# EAGLE board Bleasy-Pan (EAGLE 7.0.0)
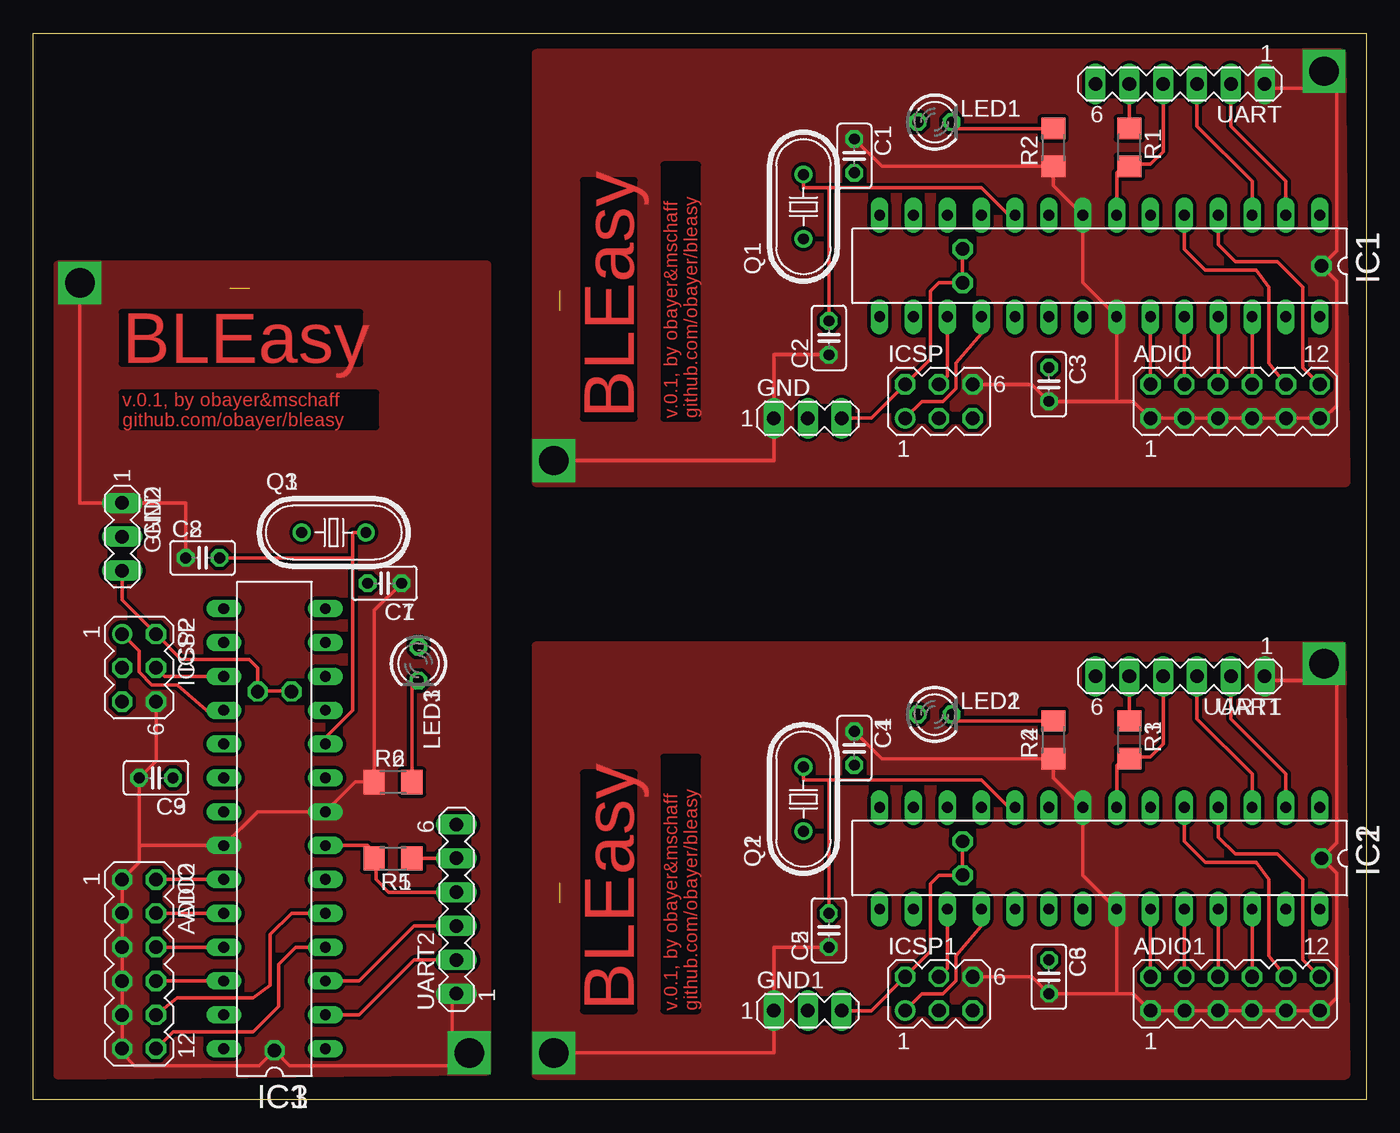
[diagram p0: board, top side]
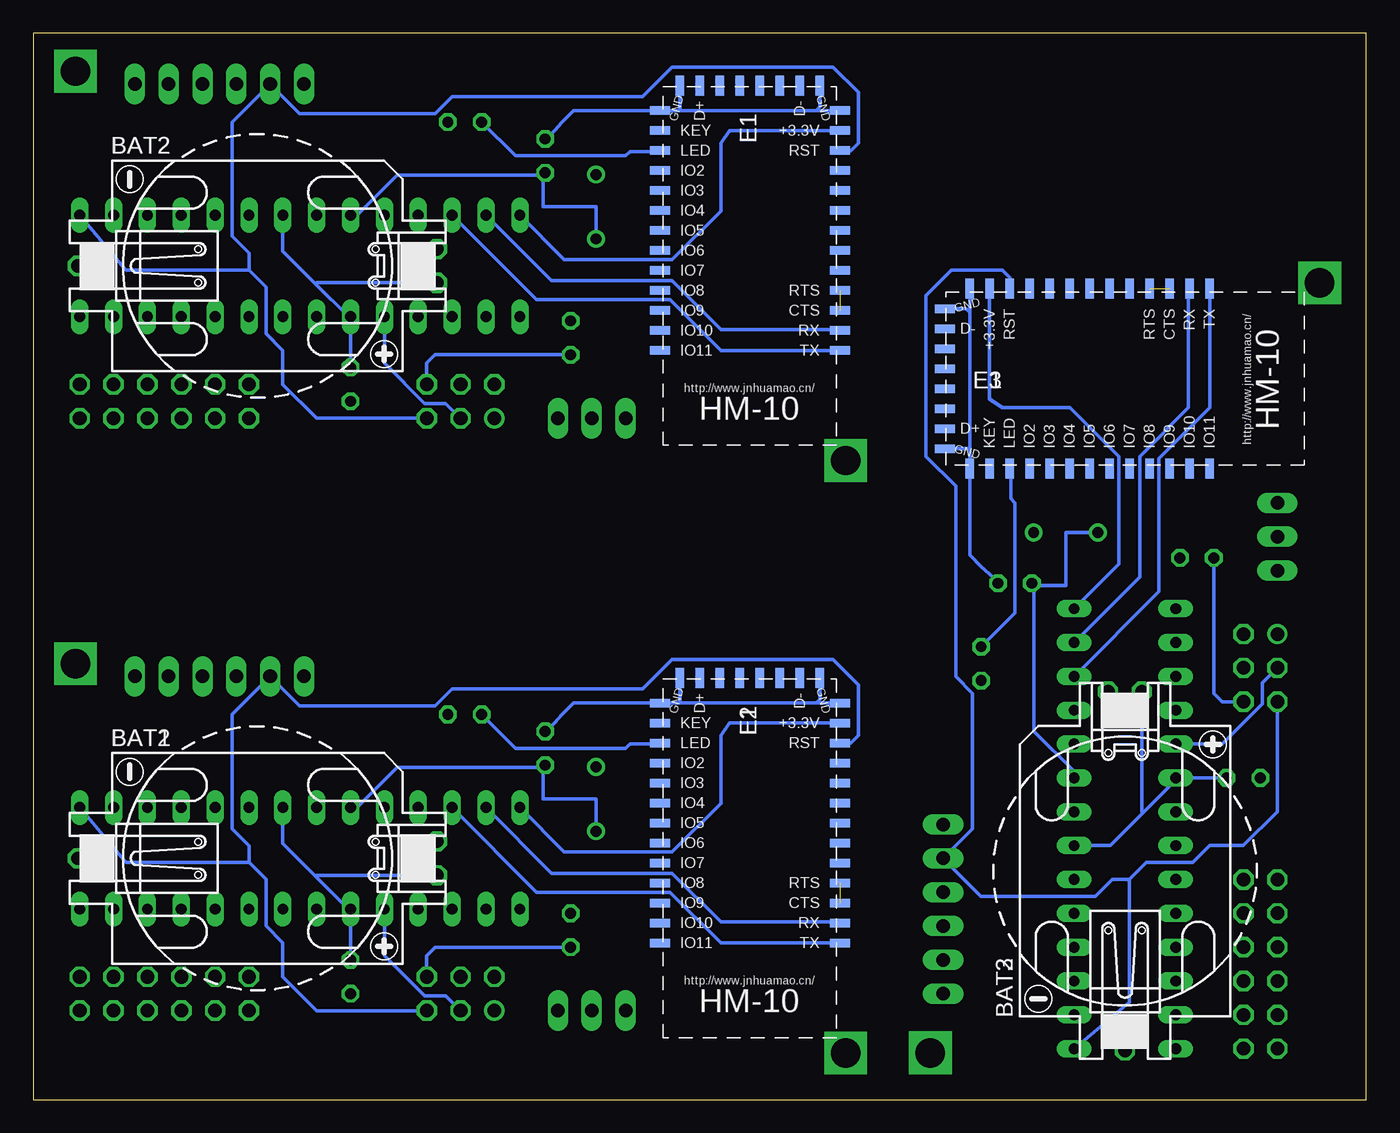
[diagram p1: board, bottom side, seen from below]

Size 100 x 80 mm. Coordinates in mm from the lower left corner, seen from the top.
Outline: 100,0 0,0 0,80 100,80 100,0
Copper layers (1*16): Top 0.035mm / dielectric 1.5mm / Bottom 0.035mm
Design rules "default": minimum track width 10mil, minimum drill 24mil, track to track 8mil, track to pad 8mil, pad to pad 8mil, via to via 8mil, smd to smd 8mil, copper to edge 40mil, drill to drill 8mil, minimum pad ring 10mil, minimum via ring 8mil, stop-mask expansion 4mil, vias tented up to drill 0mil, thermal gap 10mil

## Footprints (pad centres in the part's own frame; a part is rotated, then mirrored left to right if it is on the bottom)
MA06-2 = drill 1.016 octagon: 1 -6.35,-1.27; 2 -6.35,1.27; 3 -3.81,-1.27; 4 -3.81,1.27; 5 -1.27,-1.27; 6 -1.27,1.27; 7 1.27,-1.27; 8 1.27,1.27; 9 3.81,-1.27; 10 3.81,1.27; 11 6.35,-1.27; 12 6.35,1.27
CR2032-SOCKET-THT = drill 1 octagon: 1 -13.462,0; 2 13.462,-1.27; 3 13.462,1.27
C025-025X050 = drill 0.813 octagon: 1 -1.27,0; 2 1.27,0
26.9X13X2.2_BOARD = smd 1.5 x 0.635: 1 -7.5,0; 2 -7.5,-1.5; 3 -7.5,-3; 4 -7.5,-4.5; 5 -7.5,-6; 6 -7.5,-7.5; 8 -7.5,-10.5; 9 -7.5,-12; 10 -7.5,-13.5; 11 -7.5,-15; 12 -7.5,-16.5; 13 -7.5,-18; 22 6,-18; 23 6,-16.5; 24 6,-15; 25 6,-13.5; 26 6,-12; 27 6,-10.5; 28 6,-9; 29 6,-7.5; 30 6,-6; 31 6,-4.5; 32 6,-3; 33 6,-1.5; 34 6,0; $7 -7.5,-9 | smd 0.635 x 1.5: 14 -6,-19.875; 15 -4.5,-19.875; 16 -3,-19.875; 17 -1.5,-19.875; 18 0,-19.875; 19 1.5,-19.875; 20 3,-19.875; 21 4.5,-19.875
MA03-1 = drill 1.016 long: 1 -2.54,0; 2 0,0; 3 2.54,0
DIL28-3 = drill 0.813 long: 1 -16.51,-3.81; 2 -13.97,-3.81; 3 -11.43,-3.81; 4 -8.89,-3.81; 5 -6.35,-3.81; 6 -3.81,-3.81; 7 -1.27,-3.81; 8 1.27,-3.81; 9 3.81,-3.81; 10 6.35,-3.81; 11 8.89,-3.81; 12 11.43,-3.81; 13 13.97,-3.81; 14 16.51,-3.81; 15 16.51,3.81; 16 13.97,3.81; 17 11.43,3.81; 18 8.89,3.81; 19 6.35,3.81; 20 3.81,3.81; 21 1.27,3.81; 22 -1.27,3.81; 23 -3.81,3.81; 24 -6.35,3.81; 25 -8.89,3.81; 26 -11.43,3.81; 27 -13.97,3.81; 28 -16.51,3.81
MA03-2 = drill 1.016: 1 -2.54,-1.27 | drill 1.016 octagon: 2 -2.54,1.27; 3 0,-1.27; 4 0,1.27; 5 2.54,-1.27; 6 2.54,1.27
LED3MM = drill 0.813 octagon: A -1.27,0; K 1.27,0
HC49U70 = drill 0.813: 1 -2.413,0; 2 2.413,0
R1206 = smd 1.6 x 1.803: 1 -1.422,0; 2 1.422,0
MA06-1 = drill 1.016 long: 1 -6.35,0; 2 -3.81,0; 3 -1.27,0; 4 1.27,0; 5 3.81,0; 6 6.35,0

## Placement (x,y rotation side)
ADIO  [MA06-2]  90.17,52.39 0 top
ADIO1  [MA06-2]  90.17,7.94 0 top
ADIO2  [MA06-2]  7.94,10.16 270 top
BAT1  CR2032_2+_1-SKT  [CR2032-SOCKET-THT]  83.18,18.1 0 bottom
BAT2  CR2032_2+_1-SKT  [CR2032-SOCKET-THT]  83.18,62.55 0 bottom
BAT3  CR2032_2+_1-SKT  [CR2032-SOCKET-THT]  18.1,17.15 90 bottom
C1  22p  [C025-025X050]  61.59,70.8 270 top
C2  22p  [C025-025X050]  59.69,57.15 90 top
C3  100n  [C025-025X050]  76.2,53.66 270 top
C4  22p  [C025-025X050]  61.59,26.35 270 top
C5  22p  [C025-025X050]  59.69,12.7 90 top
C6  100n  [C025-025X050]  76.2,9.21 270 top
C7  22p  [C025-025X050]  26.35,38.74 180 top
C8  22p  [C025-025X050]  12.7,40.64 0 top
C9  100n  [C025-025X050]  9.21,24.13 180 top
E1  HM-10-BOARD  [26.9X13X2.2_BOARD]  46.99,56.2 180 bottom
E2  HM-10-BOARD  [26.9X13X2.2_BOARD]  46.99,11.75 180 bottom
E3  HM-10-BOARD  [26.9X13X2.2_BOARD]  11.75,53.34 270 bottom
GND  [MA03-1]  58.1,51.12 0 top
GND1  [MA03-1]  58.1,6.67 0 top
GND2  [MA03-1]  6.67,42.23 270 top
IC1  ATMEGA328-PU  [DIL28-3]  80.01,62.55 180 top
IC2  ATMEGA328-PU  [DIL28-3]  80.01,18.1 180 top
IC3  ATMEGA328-PU  [DIL28-3]  18.1,20.32 90 top
ICSP  [MA03-2]  67.94,52.39 0 top
ICSP1  [MA03-2]  67.94,7.94 0 top
ICSP2  [MA03-2]  7.94,32.39 270 top
LED1  [LED3MM]  67.63,73.34 0 top
LED2  [LED3MM]  67.63,28.89 0 top
LED3  [LED3MM]  28.89,32.7 270 top
Q1  8 MHz  [HC49U70]  57.78,66.99 90 top
Q2  8 MHz  [HC49U70]  57.78,22.54 90 top
Q3  8 MHz  [HC49U70]  22.54,42.55 0 top
R1  100k  [R1206]  82.23,71.44 270 top
R2  270  [R1206]  76.52,71.44 90 top
R3  100k  [R1206]  82.23,26.99 270 top
R4  270  [R1206]  76.52,26.99 90 top
R5  100k  [R1206]  26.99,18.1 180 top
R6  270  [R1206]  26.99,23.81 0 top
UART  \  [MA06-1]  86.04,76.2 180 top
UART1  \  [MA06-1]  86.04,31.75 180 top
UART2  \  [MA06-1]  31.75,14.29 90 top

## Library data of the parts
ADIO ADIO1 ADIO2 GND GND1 GND2 ICSP ICSP1 ICSP2 UART UART1 UART2 = con-lstb; OC_FARNELL: unknown; OC_NEWARK: unknown
BAT1-BAT3 = con_bat_2032__s_
C1-C9 = rcl
E1-E3 = JNHuaMao
IC1-IC3 = ATMEGA328P
LED1-LED3 = led
Q1-Q3 = crystal; OC_FARNELL: unknown; OC_NEWARK: unknown
R1-R6 = resistor

## Nets
+3V1: BAT1.2 BAT1.3 C6.1 GND1.3 IC2.7 IC2.20 ICSP1.2 R3.2 UART1.4
+3V2: BAT3.2 BAT3.3 C9.1 GND2.3 IC3.7 IC3.20 ICSP2.2 R5.2 UART2.4
+3V3: BAT2.2 BAT2.3 C3.1 GND.3 IC1.7 IC1.20 ICSP.2 R1.2 UART.4
GND: ADIO.1 ADIO.3 ADIO.5 ADIO.7 ADIO.9 ADIO.11 BAT2.1 C1.1 C2.1 C3.2 E1.13 E1.14 E1.21 E1.22 GND.1 IC1.8 IC1.22 ICSP.6 R2.1 UART.1
GND1: ADIO1.1 ADIO1.3 ADIO1.5 ADIO1.7 ADIO1.9 ADIO1.11 BAT1.1 C4.1 C5.1 C6.2 E2.13 E2.14 E2.21 E2.22 GND1.1 IC2.8 IC2.22 ICSP1.6 R4.1 UART1.1
GND2: ADIO2.1 ADIO2.3 ADIO2.5 ADIO2.7 ADIO2.9 ADIO2.11 BAT3.1 C7.1 C8.1 C9.2 E3.13 E3.14 E3.21 E3.22 GND2.1 IC3.8 IC3.22 ICSP2.6 R6.1 UART2.1
HM10_RX: E1.2 IC1.13
HM10_RX1: E2.2 IC2.13
HM10_RX2: E3.2 IC3.13
HM10_TX: E1.1 IC1.12
HM10_TX1: E2.1 IC2.12
HM10_TX2: E3.1 IC3.12
MISO: IC1.18 ICSP.1
MISO1: IC2.18 ICSP1.1
MISO2: IC3.18 ICSP2.1
N$1: C2.2 IC1.10 Q1.2
N$2: C1.2 IC1.9 Q1.1
N$3: IC1.17 ICSP.4
N$4: ADIO.12 IC1.4
N$5: ADIO.10 IC1.5
N$6: E1.24 LED1.A
N$7: LED1.K R2.2
N$8: E1.12 IC1.14
N$9: ADIO.2 IC1.23
N$10: ADIO.4 IC1.24
N$11: ADIO.6 IC1.25
N$12: ADIO.8 IC1.26
N$13: E1.3 E1.4
N$14: C5.2 IC2.10 Q2.2
N$15: C4.2 IC2.9 Q2.1
N$16: IC2.17 ICSP1.4
N$17: E2.12 IC2.14
N$18: E2.24 LED2.A
N$19: LED2.K R4.2
N$20: E2.3 E2.4
N$21: ADIO1.12 IC2.4
N$22: ADIO1.10 IC2.5
N$23: ADIO1.2 IC2.23
N$24: ADIO1.4 IC2.24
N$25: ADIO1.6 IC2.25
N$26: ADIO1.8 IC2.26
N$27: C8.2 IC3.10 Q3.2
N$28: C7.2 IC3.9 Q3.1
N$29: IC3.17 ICSP2.4
N$30: E3.12 IC3.14
N$31: E3.24 LED3.A
N$32: LED3.K R6.2
N$33: E3.3 E3.4
N$34: ADIO2.12 IC3.4
N$35: ADIO2.10 IC3.5
N$36: ADIO2.2 IC3.23
N$37: ADIO2.4 IC3.24
N$38: ADIO2.6 IC3.25
N$39: ADIO2.8 IC3.26
RST: E1.11 IC1.1 ICSP.5 R1.1 UART.5
RST1: E2.11 IC2.1 ICSP1.5 R3.1 UART1.5
RST2: E3.11 IC3.1 ICSP2.5 R5.1 UART2.5
RX: IC1.2 UART.2
RX1: IC2.2 UART1.2
RX2: IC3.2 UART2.2
SCK: IC1.19 ICSP.3
SCK1: IC2.19 ICSP1.3
SCK2: IC3.19 ICSP2.3
TX: IC1.3 UART.3
TX1: IC2.3 UART1.3
TX2: IC3.3 UART2.3

## Tracks (layer width: path | path; a pad name or v marks a point on that pad's centre or on a via)
+3V1
  Top 0.254: GND1.3 62.86,6.67 ICSP1.2 67.31,11.11 67.31,16.19 67.94,16.83 69.69,16.83 | 69.69,16.83 69.69,19.37 BAT1.3 | 69.69,16.83 BAT1.2 | IC2.7 81.28,25.08 81.76,25.57 R3.2 | UART1.4 84.77,26.67 83.82,25.72 82.38,25.72
  Top 0.406: 82.38,25.72 R3.2
  Bottom 0.254: IC2.7 81.28,19.21 78.82,16.75 | 78.82,16.75 76.36,14.29 IC2.20 C6.1 | BAT1.2 78.74,16.83 78.82,16.75
+3V2
  Top 0.254: GND2.3 6.67,37.47 ICSP2.2 11.11,33.02 16.19,33.02 16.83,32.39 16.83,30.64 | 16.83,30.64 19.37,30.64 BAT3.3 | 16.83,30.64 BAT3.2 | IC3.7 25.08,19.05 25.57,18.57 R5.2 | UART2.4 26.67,15.56 25.72,16.51 25.72,17.95
  Top 0.406: 25.72,17.95 R5.2
  Bottom 0.254: IC3.7 19.21,19.05 16.75,21.51 | 16.75,21.51 14.29,23.97 IC3.20 C9.1 | BAT3.2 16.83,21.59 16.75,21.51
+3V3
  Top 0.254: GND.3 62.86,51.12 ICSP.2 67.31,55.56 67.31,60.64 67.94,61.28 69.69,61.28 | 69.69,61.28 69.69,63.82 BAT2.3 | 69.69,61.28 BAT2.2 | IC1.7 81.28,69.53 81.76,70.02 R1.2 | UART.4 84.77,71.12 83.82,70.17 82.38,70.17
  Top 0.406: 82.38,70.17 R1.2
  Bottom 0.254: IC1.7 81.28,63.66 78.82,61.2 | 78.82,61.2 76.36,58.74 IC1.20 C3.1 | BAT2.2 78.74,61.28 78.82,61.2
GND  (via drill 2.2)
  Top 0.254: C2.1 55.56,55.88 GND.1 55.56,47.94 v39.05,47.94 | ICSP.6 74.93,53.66 C3.2 81.28,52.39 | 97.79,75.88 97.79,63.69 BAT2.1 97.79,61.4 97.79,52.07 96.84,51.12 ADIO.11 ADIO.9 ADIO.7 ADIO.5 ADIO.3 ADIO.1 82.55,52.39 81.28,52.39 | C1.1 63.65,70.02 R2.1 76.52,68.58 IC1.8 78.74,61.28 IC1.22 81.28,52.39 | 97.79,75.88 92.71,75.88 UART.1 | 97.79,75.88 v96.84,77.15
  Bottom 0.254: E1.22 52.99,74.26 | C1.1 61.46,72.07 60.32,73.34 59.47,74.2 E1.22 | 51.43,76.02 E1.21 51.49,74.25 51.43,74.2 | E1.13 41.27,74.2 | 41.27,74.2 51.43,74.2 | 51.43,74.2 E1.22 | E1.14 40.99,74.48 41.27,74.2 | C2.1 69.85,55.88 70.48,55.24 ICSP.6
  pour Top (isolate 0.254, no thermals): 37.78,46.35 98.42,46.35 98.11,78.42 37.78,78.42
GND1  (via drill 2.2)
  Top 0.254: C5.1 55.56,11.43 GND1.1 55.56,3.49 v39.05,3.49 | ICSP1.6 74.93,9.21 C6.2 81.28,7.94 | 97.79,31.43 97.79,19.24 BAT1.1 97.79,16.95 97.79,7.62 96.84,6.67 ADIO1.11 ADIO1.9 ADIO1.7 ADIO1.5 ADIO1.3 ADIO1.1 82.55,7.94 81.28,7.94 | C4.1 63.65,25.57 R4.1 76.52,24.13 IC2.8 78.74,16.83 IC2.22 81.28,7.94 | 97.79,31.43 92.71,31.43 UART1.1 | 97.79,31.43 v96.84,32.7
  Bottom 0.254: E2.22 52.99,29.81 | C4.1 61.46,27.62 60.32,28.89 59.47,29.75 E2.22 | 51.43,31.57 E2.21 51.49,29.8 51.43,29.75 | E2.13 41.27,29.75 | 41.27,29.75 51.43,29.75 | 51.43,29.75 E2.22 | E2.14 40.99,30.03 41.27,29.75 | C5.1 69.85,11.43 70.48,10.79 ICSP1.6
  pour Top (isolate 0.254, no thermals): 37.78,1.9 98.42,1.9 98.11,33.97 37.78,33.97
GND2  (via drill 2.2)
  Top 0.254: C8.1 11.43,44.77 GND2.1 3.49,44.77 v3.49,61.28 | ICSP2.6 9.21,25.4 C9.2 7.94,19.05 | 31.43,2.54 19.24,2.54 BAT3.1 16.95,2.54 7.62,2.54 6.67,3.49 ADIO2.11 ADIO2.9 ADIO2.7 ADIO2.5 ADIO2.3 ADIO2.1 7.94,17.78 7.94,19.05 | C7.1 25.57,36.68 R6.1 24.13,23.81 IC3.8 16.83,21.59 IC3.22 7.94,19.05 | 31.43,2.54 31.43,7.62 UART2.1 | 31.43,2.54 v32.7,3.49
  Bottom 0.254: E3.22 29.81,47.34 | C7.1 27.62,38.87 28.89,40.01 29.75,40.86 E3.22 | 31.57,48.9 E3.21 29.8,48.84 29.75,48.9 | E3.13 29.75,59.06 | 29.75,59.06 29.75,48.9 | 29.75,48.9 E3.22 | E3.14 30.03,59.34 29.75,59.06 | C8.1 11.43,30.48 10.79,29.85 ICSP2.6
  pour Top (isolate 0.254, no thermals): 1.9,62.55 1.9,1.91 33.97,2.22 33.97,62.55
HM10_RX
  Bottom 0.254: IC1.13 61.12,61.44 52.07,61.44 48.42,57.78 40.16,57.78 E1.2
HM10_RX1
  Bottom 0.254: IC2.13 61.12,16.98 52.07,16.98 48.42,13.33 40.16,13.33 E2.2
HM10_RX2
  Bottom 0.254: IC3.13 16.98,39.21 16.98,48.26 13.33,51.91 13.33,60.17 E3.2
HM10_TX
  Bottom 0.254: E1.1 48.42,56.2 52.23,60.01 62.23,60.01 IC1.12
HM10_TX1
  Bottom 0.254: E2.1 48.42,11.75 52.23,15.56 62.23,15.56 IC2.12
HM10_TX2
  Bottom 0.254: E3.1 11.75,51.91 15.56,48.1 15.56,38.1 IC3.12
MISO
  Top 0.254: IC1.18 71.12,57.47 69.21,55.24 69.21,53.34 68.26,52.39 66.67,52.39 ICSP.1
MISO1
  Top 0.254: IC2.18 71.12,13.02 69.21,10.79 69.21,8.89 68.26,7.94 66.67,7.94 ICSP1.1
MISO2
  Top 0.254: IC3.18 13.02,29.21 10.79,31.12 8.89,31.12 7.94,32.07 7.94,33.66 ICSP2.1
N$1
  Top 0.254: IC1.10 73.18,66.36 71.12,68.42 59.69,68.42 | 59.69,68.42 57.78,68.42 Q1.2 | C2.2 59.69,68.42
N$2
  Bottom 0.254: IC1.9 75.72,66.36 72.71,69.37 61.75,69.37 | C1.2 61.75,69.37 | 61.75,69.37 61.75,66.99 57.78,66.99 Q1.1
N$3
  Top 0.254: IC1.17 68.58,54.29 ICSP.4
N$4
  Top 0.254: IC1.4 88.9,64.13 90.17,62.86 93.34,62.86 95.25,60.96 95.25,54.93 ADIO.12
N$5
  Top 0.254: IC1.5 86.36,63.82 87.95,62.23 91.76,62.23 92.71,60.96 92.71,55.24 ADIO.10
N$6
  Bottom 0.254: LED1.A 63.82,70.8 55.56,70.8 55.24,71.12 53.07,71.12 E1.24
N$7
  Top 0.254: R2.2 69.38,72.86 LED1.K
N$8
  Bottom 0.254: IC1.14 60.16,63.02 52.07,63.02 48.42,66.67 48.42,71.75 47.78,72.71 E1.12
N$9
  Top 0.254: ADIO.2 IC1.23
N$10
  Top 0.254: IC1.24 ADIO.4
N$11
  Top 0.254: ADIO.6 IC1.25
N$12
  Top 0.254: IC1.26 ADIO.8
N$13  (1 unrouted)
N$14
  Top 0.254: IC2.10 73.18,21.91 71.12,23.97 59.69,23.97 | 59.69,23.97 57.78,23.97 Q2.2 | C5.2 59.69,23.97
N$15
  Bottom 0.254: IC2.9 75.72,21.91 72.71,24.92 61.75,24.92 | C4.2 61.75,24.92 | 61.75,24.92 61.75,22.54 57.78,22.54 Q2.1
N$16
  Top 0.254: IC2.17 68.58,9.84 ICSP1.4
N$17
  Bottom 0.254: IC2.14 60.16,18.57 52.07,18.57 48.42,22.22 48.42,27.3 47.78,28.26 E2.12
N$18
  Bottom 0.254: LED2.A 63.82,26.35 55.56,26.35 55.24,26.67 53.07,26.67 E2.24
N$19
  Top 0.254: R4.2 69.38,28.41 LED2.K
N$20  (1 unrouted)
N$21
  Top 0.254: IC2.4 88.9,19.68 90.17,18.41 93.34,18.41 95.25,16.51 95.25,10.48 ADIO1.12
N$22
  Top 0.254: IC2.5 86.36,19.37 87.95,17.78 91.76,17.78 92.71,16.51 92.71,10.79 ADIO1.10
N$23
  Top 0.254: ADIO1.2 IC2.23
N$24
  Top 0.254: IC2.24 ADIO1.4
N$25
  Top 0.254: ADIO1.6 IC2.25
N$26
  Top 0.254: IC2.26 ADIO1.8
N$27
  Top 0.254: IC3.10 21.91,27.15 23.97,29.21 23.97,40.64 | 23.97,40.64 23.97,42.55 Q3.2 | C8.2 23.97,40.64
N$28
  Bottom 0.254: IC3.9 21.91,24.61 24.92,27.62 24.92,38.58 | C7.2 24.92,38.58 | 24.92,38.58 22.54,38.58 22.54,42.55 Q3.1
N$29
  Top 0.254: IC3.17 9.84,31.75 ICSP2.4
N$30
  Bottom 0.254: IC3.14 18.57,40.16 18.57,48.26 22.22,51.91 27.3,51.91 28.26,52.55 E3.12
N$31
  Bottom 0.254: LED3.A 26.35,36.51 26.35,44.77 26.67,45.09 26.67,47.26 E3.24
N$32
  Top 0.254: R6.2 28.41,30.95 LED3.K
N$33  (1 unrouted)
N$34
  Top 0.254: IC3.4 19.68,11.43 18.41,10.16 18.41,6.99 16.51,5.08 10.48,5.08 ADIO2.12
N$35
  Top 0.254: IC3.5 19.37,13.97 17.78,12.38 17.78,8.57 16.51,7.62 10.79,7.62 ADIO2.10
N$36
  Top 0.254: ADIO2.2 IC3.23
N$37
  Top 0.254: IC3.24 ADIO2.4
N$38
  Top 0.254: ADIO2.6 IC3.25
N$39
  Top 0.254: IC3.26 ADIO2.8
RST
  Top 0.254: UART.5 R1.1
  Bottom 0.254: IC1.1 93.19,62.39 93.03,62.23 83.82,62.23 | 83.82,62.23 82.55,60.96 82.55,57.47 81.28,56.2 81.28,53.66 78.74,51.12 ICSP.5 | 83.82,62.23 83.82,63.5 85.09,64.77 85.09,73.34 UART.5 80.01,73.98 69.85,73.98 68.58,75.25 54.29,75.25 52.07,77.47 40,77.47 38.1,75.56 38.1,71.75 38.66,71.2 E1.11
RST1
  Top 0.254: UART1.5 R3.1
  Bottom 0.254: IC2.1 93.19,17.94 93.03,17.78 83.82,17.78 | 83.82,17.78 82.55,16.51 82.55,13.02 81.28,11.75 81.28,9.21 78.74,6.67 ICSP1.5 | 83.82,17.78 83.82,19.05 85.09,20.32 85.09,28.89 UART1.5 80.01,29.53 69.85,29.53 68.58,30.8 54.29,30.8 52.07,33.02 40,33.02 38.1,31.11 38.1,27.3 38.66,26.75 E2.11
RST2
  Top 0.254: UART2.5 R5.1
  Bottom 0.254: IC3.1 17.94,7.14 17.78,7.3 17.78,16.51 | 17.78,16.51 16.51,17.78 13.02,17.78 11.75,19.05 9.21,19.05 6.67,21.59 ICSP2.5 | 17.78,16.51 19.05,16.51 20.32,15.24 28.89,15.24 UART2.5 29.53,20.32 29.53,30.48 30.8,31.75 30.8,46.04 33.02,48.26 33.02,60.33 31.11,62.23 27.3,62.23 26.75,61.67 E3.11
RX
  Top 0.254: UART.2 89.85,73.02 93.98,68.9 IC1.2
RX1
  Top 0.254: UART1.2 89.85,28.57 93.98,24.45 IC2.2
RX2
  Top 0.254: UART2.2 28.57,10.48 24.45,6.35 IC3.2
SCK
  Bottom 0.254: IC1.19 73.66,55.24 70.64,52.23 69.06,52.23 ICSP.3
SCK1
  Bottom 0.254: IC2.19 73.66,10.79 70.64,7.78 69.06,7.78 ICSP1.3
SCK2
  Bottom 0.254: IC3.19 10.79,26.67 7.78,29.69 7.78,31.27 ICSP2.3
TX
  Top 0.254: UART.3 87.31,73.02 91.44,68.9 IC1.3
TX1
  Top 0.254: UART1.3 87.31,28.57 91.44,24.45 IC2.3
TX2
  Top 0.254: UART2.3 28.57,13.02 24.45,8.89 IC3.3

## Text on the board
Top: BLEasy | BLEasy | v.0.1, by obayer&mschaff / github.com/obayer/bleasy | v.0.1, by obayer&mschaff / github.com/obayer/bleasy | BLEasy | v.0.1, by obayer&mschaff / github.com/obayer/bleasy
_bPlace: E1 | E1 | E1
_tNames: UART | LED1 | C1 | R1 | R2 | IC1 | Q1 | C3 | C2 | ICSP | ADIO | GND | GND | Q1 | C2 | C1 | ICSP | LED1 | UART | C1 | LED1 | R1 | R2 | R2 | C3 | IC1 | ADIO | R1 | Q1 | ICSP | C3 | ADIO | C2 | GND | UART | IC1
_bNames: BAT2 | BAT2 | BAT2